# Altium PCB MultiPower.PcbDoc
Units mm, origin at the board's own origin, x right, y up, seen from the top; angles counter-clockwise.
Board outline 160 x 100 mm, 2 copper layers (Top Layer, Bottom Layer); 176 components, 131 nets, 634 pads, 0 vias.
Unrouted connection lines stored in the file: 412.
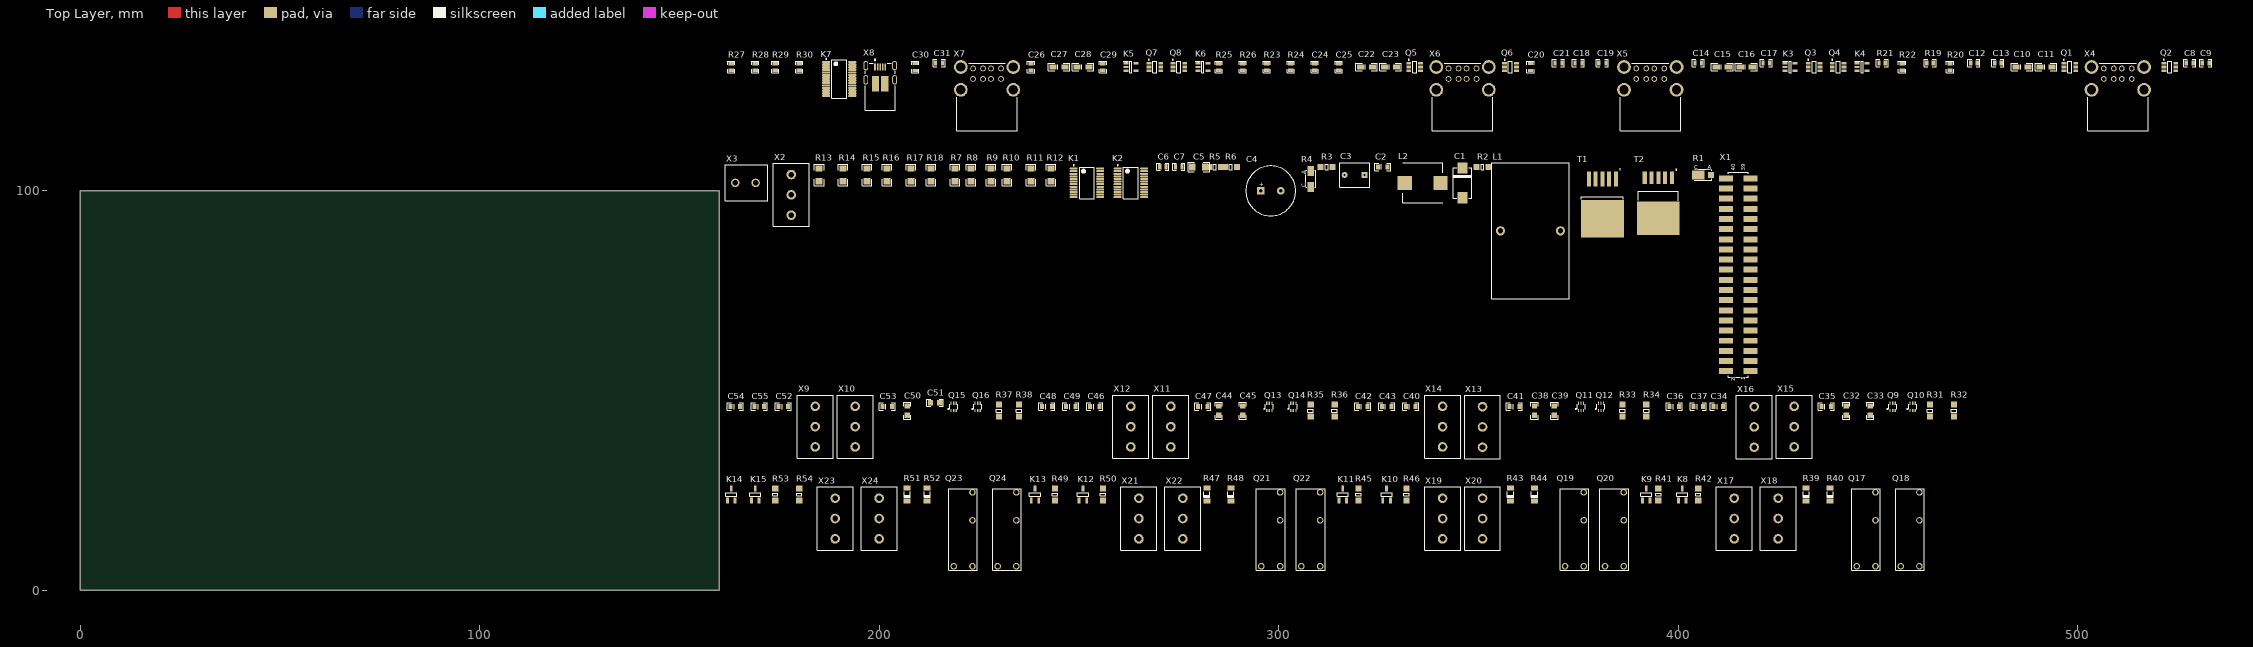
[diagram p0: Top Layer view]
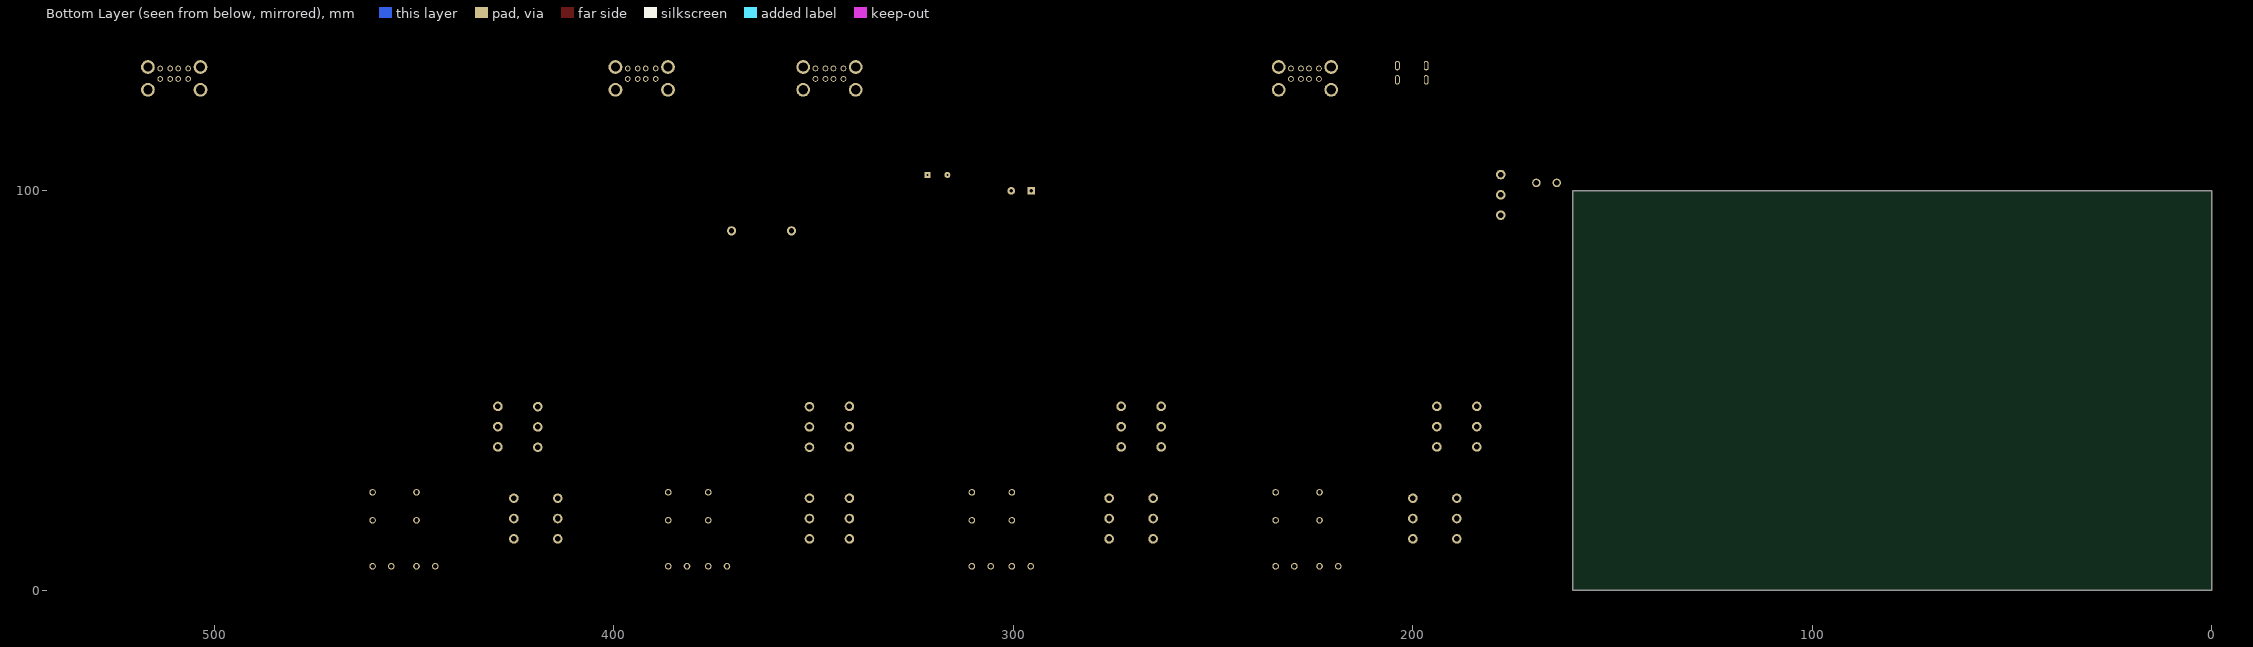
[diagram p1: Bottom Layer view, seen from below]

## Layer stack, top to bottom
Top Solder: solder mask 0.0102, Solder Resist, Dk 3.5
Top Layer: signal copper 0.0356
Dielectric 1: dielectric 0.32, FR-4, Dk 4.8
Bottom Layer: signal copper 0.0356
Bottom Solder: solder mask 0.0102, Solder Resist, Dk 3.5

## Board outline
0,0 160,0 160,100 0,100

## Design rules (kind name [scope] priority, off if disabled: settings)
Clearance [All] p1: gap=0.254 ignorepadtopadclearanceinfootprint=FALSE except(0: Arc-Hole Track-Hole SMDPad-Hole THPad-Hole Via-Hole Fill-Hole Poly-Hole Region-Hole Text-Hole)
DiffPairsRouting [All] p1: maxlimit=0.254 minlimit=0.254 mostfreqgap=0.254 toplayer_minwidth=0.381 toplayer_maxwidth=0.381 toplayer_prefwidth=0.381 bottomlayer_minwidth=0.381 bottomlayer_maxwidth=0.381 bottomlayer_prefwidth=0.381 maxuncoupledlength=12.7
PolygonConnect [All] p1: connectstyle=Relief reliefconductorwidth=0.254 reliefentries=4 polygonreliefangle="90 Angle" airgapwidth=0.254
RoomDefinition "U_USB Power" [InComponentClass('U_USB Power')] p1: confinementstyle=ConfineIn formatcopy=TRUE lockcomponents=FALSE outline 161,111 534,111 534,136 161,136
RoomDefinition U_Speisung [InComponentClass('U_Speisung')] p2: confinementstyle=ConfineIn formatcopy=TRUE lockcomponents=FALSE outline 161,52 421,52 421,110 161,110
RoomDefinition "U_DC Power" [InComponentClass('U_DC Power')] p3: confinementstyle=ConfineIn formatcopy=TRUE lockcomponents=FALSE outline 161,31 473,31 473,51 161,51
RoomDefinition "U_AC Plug Power" [InComponentClass('U_AC Plug Power')] p4: confinementstyle=ConfineIn formatcopy=TRUE lockcomponents=FALSE outline 161,3 463,3 463,30 161,30
RoutingVias [All] p1: holewidth=0.711 width=1.27 viastyle="Through Hole" minholewidth=0.711 minwidth=1.27 maxholewidth=0.711 maxwidth=1.27
SolderMaskExpansion [All] p1: expansion=0.102 istentingtop=FALSE
Width [All] p1: maxlimit=0.254 minlimit=0.254 preferedwidth=0.254
29 further rules are at their usual default settings.

## Classes and differential pairs
net class POWER: +5V +9V +12V GND L N PE
component class "U_USB Power": C8 C9 C10 C11 C12 C13 C14 C15 C16 C17 C18 C19 C20 C21 C22 C23 C24 C25 C26 C27 C28 C29 C30 C31 K3 K4 K5 K6 K7 Q1 Q2 Q3 Q4 Q5 Q6 Q7 Q8 R19 R20 R21 R22 R23 R24 R25 R26 R27 R28 R29 R30 X4 X5 X6 X7 X8
component class U_Speisung: C1 C2 C3 C4 C5 C6 C7 K1 K2 L1 L2 R1 R2 R3 R4 R5 R6 R7 R8 R9 R10 R11 R12 R13 R14 R15 R16 R17 R18 T1 T2 X1 X2 X3
component class "U_DC Power": C32 C33 C34 C35 C36 C37 C38 C39 C40 C41 C42 C43 C44 C45 C46 C47 C48 C49 C50 C51 C52 C53 C54 C55 Q9 Q10 Q11 Q12 Q13 Q14 Q15 Q16 R31 R32 R33 R34 R35 R36 R37 R38 X9 X10 X11 X12 X13 X14 X15 X16
component class "U_AC Plug Power": K8 K9 K10 K11 K12 K13 K14 K15 Q17 Q18 Q19 Q20 Q21 Q22 Q23 Q24 R39 R40 R41 R42 R43 R44 R45 R46 R47 R48 R49 R50 R51 R52 R53 R54 X17 X18 X19 X20 X21 X22 X23 X24
differential pair D: +D_P -D_N

## Components (designator, comment, footprint, x,y, rotation, side; value= is the part's Value field where it differs from the comment)
C1 "Capacitor" T521X337M016ATE015 346,102 r90 top value=330uF
C2 "Capacitor" "CAP TAN A R" 326,106 r0 top value=10uF
C3 "Capacitor" R82EC4100Z370J 319,104 r0 top value=1uF
C4 "Capacitor" "CAP ELKO 12.5x25x5 S" 298,100 r0 top value=4.7mF
C5 "Capacitor" "CAP CER 1206 H" 280,106 r0 top value=100nF
C6 "Capacitor" "CAP CER 0805 R" 271,106 r0 top value=100nF
C7 "Capacitor" "CAP CER 0805 R" 275,106 r0 top value=100nF
C8 "Capacitor P" T58W9476M6R3C0300 528,132 r0 top value=47uF
C9 "Capacitor P" T58W9476M6R3C0300 532,132 r0 top value=47uF
C10 "Capacitor P" "CAP TAN A H" 486,131 r0 top value=100uF
C11 "Capacitor P" "CAP TAN A H" 492,131 r0 top value=100uF
C12 "Capacitor" "CAP CER 0805 R" 474,132 r0 top value=100nF
C13 "Capacitor" "CAP CER 0805 R" 480,132 r0 top value=100nF
C14 "Capacitor" "CAP CER 0805 R" 405,132 r0 top value=100nF
C15 "Capacitor P" "CAP TAN A H" 411,131 r0 top value=100uF
C16 "Capacitor P" "CAP TAN A H" 417,131 r0 top value=100uF
C17 "Capacitor" "CAP CER 0805 R" 422,132 r0 top value=100nF
C18 "Capacitor P" T58W9476M6R3C0300 375,132 r0 top value=47uF
C19 "Capacitor P" T58W9476M6R3C0300 381,132 r0 top value=47uF
C20 "Capacitor P" T58W9476M6R3C0300 363,131 r90 top value=47uF
C21 "Capacitor P" T58W9476M6R3C0300 370,132 r0 top value=47uF
C22 "Capacitor P" "CAP TAN A H" 322,131 r0 top value=100uF
C23 "Capacitor P" "CAP TAN A H" 328,131 r0 top value=100uF
C24 "Capacitor" "CAP CER 0805 R" 309,131 r90 top value=100nF
C25 "Capacitor" "CAP CER 0805 R" 315,131 r90 top value=100nF
C26 "Capacitor" "CAP CER 0805 R" 238,131 r90 top value=100nF
C27 "Capacitor P" "CAP TAN A H" 245,131 r0 top value=100uF
C28 "Capacitor P" "CAP TAN A H" 251,131 r0 top value=100uF
C29 "Capacitor" "CAP CER 0805 R" 256,131 r90 top value=100nF
C30 "Capacitor P" T58W9476M6R3C0300 209,131 r90 top value=47uF
C31 "Capacitor P" T58W9476M6R3C0300 215,132 r0 top value=47uF
C32 "Capacitor" "CAP CER 0805 H" 442,45 r90 top value=1nF
C33 "Capacitor" "CAP CER 0805 H" 448,45 r90 top value=1nF
C34 "Capacitor P" "CAP TAN A R" 410,46 r0 top value=10uF
C35 "Capacitor P" "CAP TAN A R" 437,46 r0 top value=10uF
C36 "Capacitor P" "CAP TAN A R" 399,46 r0 top value=1uF
C37 "Capacitor P" "CAP TAN A R" 405,46 r0 top value=1uF
C38 "Capacitor" "CAP CER 0805 H" 364,45 r90 top value=1nF
C39 "Capacitor" "CAP CER 0805 H" 369,45 r90 top value=1nF
C40 "Capacitor P" "CAP TAN A R" 333,46 r0 top value=10uF
C41 "Capacitor P" "CAP TAN A R" 359,46 r0 top value=10uF
C42 "Capacitor P" "CAP TAN A R" 321,46 r0 top value=1uF
C43 "Capacitor P" "CAP TAN A R" 327,46 r0 top value=1uF
C44 "Capacitor" "CAP CER 0805 H" 285,45 r90 top value=1nF
C45 "Capacitor" "CAP CER 0805 H" 291,45 r90 top value=1nF
C46 "Capacitor P" "CAP TAN A R" 254,46 r0 top value=10uF
C47 "Capacitor P" "CAP TAN A R" 281,46 r0 top value=10uF
C48 "Capacitor P" "CAP TAN A R" 242,46 r0 top value=1uF
C49 "Capacitor P" "CAP TAN A R" 248,46 r0 top value=1uF
C50 "Capacitor" "CAP CER 0805 H" 207,45 r90 top value=1nF
C51 "Capacitor" "CAP CER 0805 H" 214,47 r0 top value=1nF
C52 "Capacitor P" "CAP TAN A R" 176,46 r0 top value=10uF
C53 "Capacitor P" "CAP TAN A R" 202,46 r0 top value=10uF
C54 "Capacitor P" "CAP TAN A R" 164,46 r0 top value=1uF
C55 "Capacitor P" "CAP TAN A R" 170,46 r0 top value=1uF
K1 "PCA8575PW" TSOP65P640X110-24M 252,102 r0 top
K2 "PCA8575PW" TSOP65P640X110-24M 263,102 r0 top
K3 "MC74VHC1G135DBVT1G" SOT95P275X110-5N 428,131 r0 top
K4 "MC74VHC1G135DBVT1G" SOT95P275X110-5N 446,131 r0 top
K5 "MC74VHC1G135DBVT1G" SOT95P275X110-5N 263,131 r0 top
K6 "MC74VHC1G135DBVT1G" SOT95P275X110-5N 281,131 r0 top
K7 "DG1207EUI+" TSOP65P640X100-28N 190,128 r0 top
K8 "BC817-16-7-F" SOT23-3 401,24 r0 top
K9 "BC817-16-7-F" SOT23-3 392,24 r0 top
K10 "BC817-16-7-F" SOT23-3 327,24 r0 top
K11 "BC817-16-7-F" SOT23-3 316,24 r0 top
K12 "BC817-16-7-F" SOT23-3 251,24 r0 top
K13 "BC817-16-7-F" SOT23-3 239,24 r0 top
K14 "BC817-16-7-F" SOT23-3 163,24 r0 top
K15 "BC817-16-7-F" SOT23-3 169,24 r0 top
L1 "Inductor" SHBC14-1R2A0187V 363,90 r0 top value=190uH
L2 "Inductor" SRP1038C6R8M 336,102 r0 top value=47uH
Q1 "MIC2033" SOT-23-6L 498,131 r0 top
Q2 "MIC2033" SOT-23-6L 523,131 r0 top
Q3 "MIC2033" SOT-23-6L 434,131 r0 top
Q4 "MIC2033" SOT-23-6L 440,131 r0 top
Q5 "MIC2033" SOT-23-6L 334,131 r0 top
Q6 "MIC2033" SOT-23-6L 358,131 r0 top
Q7 "MIC2033" SOT-23-6L 269,131 r0 top
Q8 "MIC2033" SOT-23-6L 275,131 r0 top
Q9 "SI1865DDL-T1-BE3" SOT-363 453,45 r0 top
Q10 "SI1865DDL-T1-BE3" SOT-363 458,45 r0 top
Q11 "SI1865DDL-T1-BE3" SOT-363 375,45 r0 top
Q12 "SI1865DDL-T1-BE3" SOT-363 380,45 r0 top
Q13 "SI1865DDL-T1-BE3" SOT-363 297,45 r0 top
Q14 "SI1865DDL-T1-BE3" SOT-363 303,45 r0 top
Q15 "SI1865DDL-T1-BE3" SOT-363 218,45 r0 top
Q16 "SI1865DDL-T1-BE3" SOT-363 224,45 r0 top
Q17 "G5NB1A4EDC5" G5NB1A4DC5 447,5 r90 top
Q18 "G5NB1A4EDC5" G5NB1A4DC5 458,5 r90 top
Q19 "G5NB1A4EDC5" G5NB1A4DC5 374,5 r90 top
Q20 "G5NB1A4EDC5" G5NB1A4DC5 384,5 r90 top
Q21 "G5NB1A4EDC5" G5NB1A4DC5 298,5 r90 top
Q22 "G5NB1A4EDC5" G5NB1A4DC5 308,5 r90 top
Q23 "G5NB1A4EDC5" G5NB1A4DC5 221,5 r90 top
Q24 "G5NB1A4EDC5" G5NB1A4DC5 232,5 r90 top
R1 "V8PAM10S-M3/H" DO-221BC 405,104 r0 top
R2 "Resistor" RESMELF3514N 351,106 r0 top value=7.5k
R3 "Resistor" RESMELF3514N 312,106 r0 top value=1.2k
R4 "B340A-M3/5AT" DO-214AC 308,103 r90 top
R5 "Resistor" RESMELF3514N 284,106 r0 top value=68k
R6 "Resistor" RESMELF3514N 288,106 r0 top value=6.8k
R7 "Resistor" "RES 1206 H" 219,104 r90 top value=0
R8 "Resistor" "RES 1206 H" 223,104 r90 top value=0
R9 "Resistor" "RES 1206 H" 228,104 r90 top value=0
R10 "Resistor" "RES 1206 H" 232,104 r90 top value=0
R11 "Resistor" "RES 1206 H" 238,104 r90 top value=0
R12 "Resistor" "RES 1206 H" 243,104 r90 top value=0
R13 "Resistor" "RES 1206 H" 185,104 r90 top value=0
R14 "Resistor" "RES 1206 H" 191,104 r90 top value=0
R15 "Resistor" "RES 1206 H" 197,104 r90 top value=0
R16 "Resistor" "RES 1206 H" 202,104 r90 top value=0
R17 "Resistor" "RES 1206 H" 208,104 r90 top value=0
R18 "Resistor" "RES 1206 H" 213,104 r90 top value=0
R19 "Resistor" "RES 0805 R" 463,132 r0 top value=10k
R20 "Resistor" "RES 0805 R" 468,131 r90 top value=10k
R21 "Resistor" "RES 0805 R" 451,132 r0 top value=10k
R22 "Resistor" "RES 0805 R" 456,131 r90 top value=10k
R23 "Resistor" "RES 0805 R" 297,131 r90 top value=10k
R24 "Resistor" "RES 0805 R" 303,131 r90 top value=10k
R25 "Resistor" "RES 0805 R" 285,131 r90 top value=10k
R26 "Resistor" "RES 0805 R" 291,131 r90 top value=10k
R27 "Resistor" "RES 0805 R" 163,131 r90 top value=10k
R28 "Resistor" "RES 0805 R" 169,131 r90 top value=10k
R29 "Resistor" "RES 0805 R" 174,131 r90 top value=10k
R30 "Resistor" "RES 0805 R" 180,131 r90 top value=10k
R31 "Resistor" RESMELF3514N 463,45 r90 top value=10k
R32 "Resistor" RESMELF3514N 469,45 r90 top value=10k
R33 "Resistor" RESMELF3514N 386,45 r90 top value=10k
R34 "Resistor" RESMELF3514N 392,45 r90 top value=10k
R35 "Resistor" RESMELF3514N 308,45 r90 top value=10k
R36 "Resistor" RESMELF3514N 314,45 r90 top value=10k
R37 "Resistor" RESMELF3514N 230,45 r90 top value=10k
R38 "Resistor" RESMELF3514N 235,45 r90 top value=10k
R39 "Diode" DIOMELF3515N 432,24 r90 top
R40 "Diode" DIOMELF3515N 438,24 r90 top
R41 "Resistor" RESMELF3514N 395,24 r90 top value=1k
R42 "Resistor" RESMELF3514N 405,24 r90 top value=1k
R43 "Diode" DIOMELF3515N 358,24 r90 top
R44 "Diode" DIOMELF3515N 364,24 r90 top
R45 "Resistor" RESMELF3514N 320,24 r90 top value=1k
R46 "Resistor" RESMELF3514N 332,24 r90 top value=1k
R47 "Diode" DIOMELF3515N 282,24 r90 top
R48 "Diode" DIOMELF3515N 288,24 r90 top
R49 "Resistor" RESMELF3514N 244,24 r90 top value=1k
R50 "Resistor" RESMELF3514N 256,24 r90 top value=1k
R51 "Diode" DIOMELF3515N 207,24 r90 top
R52 "Diode" DIOMELF3515N 212,24 r90 top
R53 "Resistor" RESMELF3514N 174,24 r90 top value=1k
R54 "Resistor" RESMELF3514N 180,24 r90 top value=1k
T1 "AP1501-K5G-13" TO-263-5L 381,93 r90 top
T2 "MC33167D2TR4G" TO-263-5 395,93 r90 top
X1 "40 pole header" "Header SMD Male 2x20 H" 415,79 r90 top
X2 "Netzteil 230V" 282841-3 178,99 r90 top
X3 "Netzteil 12V" 282841-2 164,102 r0 top
X4 "UJ2-ADH-1-TH" UJ2-ADH-1-TH 510,115 r0 top
X5 "UJ2-ADH-1-TH" UJ2-ADH-1-TH 393,115 r0 top
X6 "UJ2-ADH-1-TH" UJ2-ADH-1-TH 346,115 r0 top
X7 "UJ2-ADH-1-TH" UJ2-ADH-1-TH 227,115 r0 top
X8 "Micro USB" UJ2-MIBH-4-SMT-TR 199,131 r90 top
X9 "DC Power Jack" 282841-3 184,41 r90 top
X10 "DC Power Jack" 282841-3 194,41 r90 top
X11 "DC Power Jack" 282841-3 273,41 r90 top
X12 "DC Power Jack" 282841-3 263,41 r90 top
X13 "DC Power Jack" 282841-3 351,40.92 r90 top
X14 "DC Power Jack" 282841-3 341,41 r90 top
X15 "DC Power Jack" 282841-3 429,41 r90 top
X16 "DC Power Jack" 282841-3 419,40.92 r90 top
X17 "Plug AC Female" 282841-3 414,18 r90 top
X18 "Plug AC Female" 282841-3 425,18 r90 top
X19 "Plug AC Female" 282841-3 341,18 r90 top
X20 "Plug AC Female" 282841-3 351,18 r90 top
X21 "Plug AC Female" 282841-3 265,18 r90 top
X22 "Plug AC Female" 282841-3 276,18 r90 top
X23 "Plug AC Female" 282841-3 189,18 r90 top
X24 "Plug AC Female" 282841-3 200,18 r90 top

## Footprints (in the part's own frame and the unit in brackets; to place one, negate y for a bottom-side part, rotate by r counter-clockwise, add the part's x,y. Pads: shape width x height; smd on the part's side, far side on the other; paste and mask are expansions set on the pad)
282841-2 [mm]
  round 2.1 hole 1.4: 1(0,0) 2(5.08,0)
  silkscreen extent -2.54,-4.5 8.12,4.5, body extent -2.54,-4.5 8.12,4.5, height 15.11
282841-3 [mm]
  round 2.4 hole 1.4: 1(-5.08,0) 2(0,0) 3(5.08,0)
  silkscreen extent -7.9,-4.5 7.9,4.5, body extent -7.87,-4.5 7.87,4.5, height 15.2
"CAP CER 0805 H" [mm] "0805 ceramic capacitor for hand soldering"
  rect 1.3x1.35 smd: 1(-1.15,0) 2(1.15,0)
  silkscreen extent -2.1,-0.9 2.1,0.9, body extent -1,-0.62 1,0.63, height 0.8
"CAP CER 0805 R" [mm] "0805 ceramic capacitor for reflow soldering"
  rect 0.8x1.35 smd: 1(-0.8,0) 2(0.8,0)
  silkscreen extent -1.5,-0.9 1.5,0.9, body extent -1,-0.62 1,0.63, height 0.8
"CAP CER 1206 H" [mm] "1206 ceramic capacitor for hand soldering"
  rect 1.6x1.75 smd: 1(-1.6,0) 2(1.6,0)
  silkscreen extent -2.7,-1.2 2.7,1.2, body extent -1.6,-0.8 1.6,0.8, height 1.15
"CAP ELKO 12.5x25x5 S" [mm] "aluminium electrolytic capacitor standing upright on the pcb / d=12.5, h=25, pitch = 5"
  rect 1.9x1.9 hole 0.9: A(-2.5,0)
  round 1.9 hole 0.9: C(2.5,0)
  silkscreen extent -6.25,-6.25 6.25,6.25, body extent -6.25,-6.25 6.26,6.25, height 25.02
"CAP TAN A H" [mm] "tantalum chip coapcitor casetype A for hand soldering"
  rect 1.8x1.3 smd: A(-1.5,0) C(1.5,0)
  silkscreen extent -2.7,-0.95 2.7,0.95, body extent -1.6,-0.8 1.6,0.8, height 1.6
"CAP TAN A R" [mm] "tantalum chip coapcitor casetype A for reflow soldering"
  rect 1x1.3 smd: A(-1.2,0) C(1.2,0)
  silkscreen extent -2,-0.95 2,0.95, body extent -1.6,-0.8 1.6,0.8, height 1.6
DIOMELF3515N [mm] "MELF Diode, 2-Leads, Body 3.50x1.50mm, IPC Medium Density"
  rect 1.2x1.75 smd: A(1.65,0) C(-1.65,0)
  silkscreen extent -0.65,-0.78 0.65,0.77, body extent -1.85,-0.8 1.85,0.8, height 1.59
DO-214AC [mm]
  rect 2.5x1.7 smd: A(2,0) C(-2,0)
  silkscreen extent -2.1,-1.3 2.1,1.3, body extent -2.6,-1.3 2.6,1.3, height 2.4
DO-221BC [mm]
  rect 1.52x1.5 smd: A(3.22,0)
  rect 3.1x2.2 smd: C(0,0)
  silkscreen extent -0.97,-1.35 3.37,1.35, body extent -1.37,-1.3 3.82,1.3, height 0.95
G5NB1A4DC5 [mm]
  round 1.65 hole 1.1: 1(1.05,-2.35) 2(12.55,-2.35) 3(19.55,-2.35) 4(1.05,2.35)
  silkscreen extent 0,-3.6 20.5,3.6, body extent 0,-3.6 20.5,3.6, height 15.1
"Header SMD Male 2x20 H" [mm] "male header for smd mounting / pitch = 2.54mm / hand soldering"
  rect 1.5x3.5 smd: 1(-24.13,-3.048) 2(-24.13,3.048) 3(-21.59,-3.048) 4(-21.59,3.048) 5(-19.05,-3.048) 6(-19.05,3.048) 7(-16.51,-3.048) 8(-16.51,3.048) 9(-13.97,-3.048) 10(-13.97,3.048) 11(-11.43,-3.048) 12(-11.43,3.048) 13(-8.89,-3.048) 14(-8.89,3.048) 15(-6.35,-3.048) 16(-6.35,3.048) 17(-3.81,-3.048) 18(-3.81,3.048) 19(-1.27,-3.048) 20(-1.27,3.048) 21(1.27,-3.048) 22(1.27,3.048) 23(3.81,-3.048) 24(3.81,3.048) 25(6.35,-3.048) 26(6.35,3.048) 27(8.89,-3.048) 28(8.89,3.048) 29(11.43,-3.048) 30(11.43,3.048) 31(13.97,-3.048) 32(13.97,3.048) 33(16.51,-3.048) 34(16.51,3.048) 35(19.05,-3.048) 36(19.05,3.048) 37(21.59,-3.048) 38(21.59,3.048) 39(24.13,-3.048) 40(24.13,3.048)
  silkscreen extent -25.65,-2.54 25.65,2.54, body extent -25.4,-3.69 25.4,3.69, height 8.78
R82EC4100Z370J [mm]
  round 1.5 hole 0.5: A(-2.5,0)
  rect 1.5x1.5 hole 0.5: C(2.5,0)
  silkscreen extent -3.75,-3.05 3.75,3.05, body extent -3.75,-3.05 3.75,3.05, height 11.3
"RES 0805 R" [mm] "0805 resistor for reflow soldering"
  rect 0.8x1.35 smd: 1(-0.8,0) 2(0.8,0)
  silkscreen extent -1.5,-0.9 1.5,0.9, body extent -1.15,-0.67 1.15,0.68, height 0.76
"RES 1206 H" [mm] "1206 resistor for hand soldering"
  rect 1.6x1.75 smd: 1(-1.6,0) 2(1.6,0)
  silkscreen extent -2.7,-1.2 2.7,1.2, body extent -1.68,-0.86 1.68,0.87, height 0.85
RESMELF3514N [mm] "MELF Resistor, 2-Leads, Body 3.50x1.35mm, IPC Medium Density"
  rect 1.5x1.55 smd: 1(-1.5,0) 2(1.5,0)
  silkscreen extent -0.35,-0.67 0.35,0.67, body extent -1.75,-0.67 1.75,0.67, height 1.35
SHBC14-1R2A0187V [mm]
  round 2.3 hole 1.3: 1(-7.501,0) 2(7.501,0)
  silkscreen extent -9.7,-17 9.7,17, body extent -9.7,-17 9.7,17, height 38
SOT23-3 [mm] "SOT23-3"
  rect 0.7x1.5 smd: 1(-0.95,-1.5) 2(0.95,-1.5) 3(0,1.5)
  silkscreen extent -1.4,-0.45 1.4,0.45, body extent -1.45,-1.4 1.45,1.4, height 1.3
SOT95P275X110-5N [mm]
  rect 1.25x0.6 smd: 1(-1.25,0.95) 2(-1.25,0) 3(-1.25,-0.95) 4(1.25,-0.95) 5(1.25,0.95)
  silkscreen extent -1.88,-1.5 0.28,1.5, body extent -1.38,-1.5 1.38,1.5, height 1.1
SOT-23-6L [mm] "SOT23, 6-Leads, Body 2.90x2.80mm, Pitch 0.95mm, IPC Low Density"
  rect 1.2x0.65 smd: 1(-1.475,0.95) 2(-1.475,0) 3(-1.475,-0.95) 4(1.475,-0.95) 5(1.475,0) 6(1.475,0.95)
  silkscreen extent -1.6,-1.5 0.5,1.95, body extent -1.5,-1.5 1.5,1.5, height 1.45
SOT-363 [mm]
  rect 0.3x0.8 smd: 1(0,0) 2(0.65,0) 3(1.3,0) 4(1.3,1.84) 5(0.65,1.84) 6(0,1.84)
  silkscreen extent -0.8,0.29 1.65,1.54, body extent -0.4,-0.22 1.7,2.08, height 1
SRP1038C6R8M [mm]
  rect 3.55x3.5 smd: 1(-4.475,0) 2(4.475,0)
  silkscreen extent -5,-5 5,5, body extent -5.5,-5 5.5,5, height 3.81
T58W9476M6R3C0300 [mm] "0805 ceramic capacitor for reflow soldering"
  rect 0.8x1.35 smd: A(-0.889,0) C(0.889,0)
  silkscreen extent -1.5,-0.9 1.5,0.9, body extent -1.1,-0.74 1.1,0.71, height 0.86
T521X337M016ATE015 [mm]
  rect 2.8x2.6 smd: A(3.7,0) C(-3.7,0)
  silkscreen extent -3.8,-2.3 3.8,2.3, body extent -3.8,-2.3 3.8,2.3, height 4.31
TO-263-5 [mm]
  rect 3.05x1.016 smd: 1(10.3,-3.404) 2(10.3,-1.702) 3(10.3,0) 4(10.3,1.702) 5(10.3,3.404)
  rect 8.38x10.66 smd: 6(0.2,0)
  silkscreen extent 4.5,-5.01 12.4,5.01, body extent -3.99,-5.08 10.24,5.08, height 4.87
TO-263-5L [mm]
  rect 3.8x1 smd: 1(10,-3.4) 2(10,-1.7) 3(10,0) 4(10,1.7) 5(10,3.4)
  rect 9.45x10.75 smd: 6(0,0)
  silkscreen extent 4.92,-5.28 12.5,5.28, body extent -4.71,-5 10.96,5, height 4.78
TSOP65P640X100-28N [mm] "TSOP, 28-Leads, Body 9.70x4.40mm, Pitch 0.65mm, IPC Medium Density"
  oval 2.05x0.6 smd: 1(-3.275,4.225) 2(-3.275,3.575) 3(-3.275,2.925) 4(-3.275,2.275) 5(-3.275,1.625) 6(-3.275,0.975) 7(-3.275,0.325) 8(-3.275,-0.325) 9(-3.275,-0.975) 10(-3.275,-1.625) 11(-3.275,-2.275) 12(-3.275,-2.925) 13(-3.275,-3.575) 14(-3.275,-4.225) 15(3.275,-4.225) 16(3.275,-3.575) 17(3.275,-2.925) 18(3.275,-2.275) 19(3.275,-1.625) 20(3.275,-0.975) 21(3.275,-0.325) 22(3.275,0.325) 23(3.275,0.975) 24(3.275,1.625) 25(3.275,2.275) 26(3.275,2.925) 27(3.275,3.575) 28(3.275,4.225)
  silkscreen extent -3.4,-4.8 1.85,5.2, body extent -3.2,-4.8 3.2,4.8, height 1
TSOP65P640X110-24M [mm] "TSOP, 24-Leads, Body 7.80x4.40mm, Pitch 0.65mm, IPC Low Density"
  oval 2x0.5 smd: 1(-3.325,3.575) 2(-3.325,2.925) 3(-3.325,2.275) 4(-3.325,1.625) 5(-3.325,0.975) 6(-3.325,0.325) 7(-3.325,-0.325) 8(-3.325,-0.975) 9(-3.325,-1.625) 10(-3.325,-2.275) 11(-3.325,-2.925) 12(-3.325,-3.575) 13(3.325,-3.575) 14(3.325,-2.925) 15(3.325,-2.275) 16(3.325,-1.625) 17(3.325,-0.975) 18(3.325,-0.325) 19(3.325,0.325) 20(3.325,0.975) 21(3.325,1.625) 22(3.325,2.275) 23(3.325,2.925) 24(3.325,3.575)
  silkscreen extent -3.45,-3.95 1.85,4.55, body extent -3.2,-3.95 3.2,3.95, height 1.1
UJ2-ADH-1-TH [mm]
  round 1.42 hole 0.92: 1(-3.5,13.01) 2(-3.5,15.625) 3(-1,13.01) 4(-1,15.625) 5(1,13.01) 6(1,15.625) 7(3.5,13.01) 8(3.5,15.625)
  round 3.45 hole 2.3: 9(-6.57,15.98) 10(6.57,10.3) 11(-6.57,10.3) 12(6.57,15.98)
  silkscreen extent -7.55,0 7.55,16.95, body extent -8.02,0.03 8.02,17.13, height 16.17
UJ2-MIBH-4-SMT-TR [mm]
  rect 1.7x0.4 smd: 1(0,0.03) 2(0,-0.62) 3(0,-1.27) 4(0,-1.92) 5(0,-2.57)
  oval 2.4x1.2 hole 0.6 slot 1.7 at 0 deg: SH1(-3.2,2.33) SH2(0.35,2.33) SH5(-3.2,-4.87) SH6(0.35,-4.87)
  rect 3.9x1.8 smd: SH3(-4.2,-0.12) SH4(-4.2,-2.42)
  silkscreen extent -10.85,-5.02 2,2.48, body extent -10.82,-5.02 0.97,2.47, height 2.71

## Part data
C1 C2 C3 C4: library part "Capacitor P", "Polarized Capacitor", LatestRevisionDate=02.04.2019, Publisher="ICT Berufsbildungscenter AG"
C5 C6 C7 C12 C13 C14 C17 C24 C25 C26 C29 C32 C33 C38 C39 C44 C45 C50 C51: "Non polarized capacitor", LatestRevisionDate=01.04.2019, Publisher="ICT Berufsbildungscenter AG"
C8 C9 C10 C11 C15 C16 C18 C19 C20 C21 C22 C23 C27 C28 C30 C31 C34 C35 C36 C37 C40 C41 C42 C43 C46 C47 C48 C49 C52 C53 C54 C55: "Polarized Capacitor", LatestRevisionDate=02.04.2019, Publisher="ICT Berufsbildungscenter AG"
K7: "Analog Switch ICs", Manufacturer_Name="Maxim Integrated", Mouser Part Number=700-DG1207EUI+, ComponentLink1Description="New link", ComponentLink1URL=https://www.mouser.ch/ProductDetail/Maxim-Integrated/DG1207EUI%2b?qs=DPoM0jnrROX2%252BoIpSyCc8Q%3D%3D, Datasheet Link=https://datasheets.maximintegrated.com/en/ds/DG1206-DG1207.pdf, Height=1.1mm, Manufacturer_Part_Number=DG1207EUI+, Mouser Price/Stock=https://www.mouser.co.uk/ProductDetail/Maxim-Integrated/DG1207EUI%2b?qs=DPoM0jnrROX2%252BoIpSyCc8Q%3D%3D, Supplier 1=Mouser, Supplier Part Number 1=700-DG1207EUI+
K8 K9 K10 K11 K12 K13 K14 K15: "Transistor NPN in SOT23-3 package", Supplier Part Number 1=621-BC817-16-7-F, Supplier 1=Mouser
Q17 Q18 Q19 Q20 Q21 Q22 Q23 Q24: library part Relay-SPST, "Single-Pole Single-Throw Relay", LatestRevisionDate=17-Jul-2002, LatestRevisionNote="Re-released for DXP Platform.", PackageReference=MODULE4, Published=24-Mar-1999, Publisher="Altium Limited"
R1 R4: library part "Schottky Diode", "Schottky Diode", LatestRevisionDate=03.04.2019, Publisher="ICT Berufsbildungscenter AG"
T1: "Switching Voltage Regulators", Supplier Part Number 1=621-AP1501-K5G-13, ComponentLink1Description="New link", ComponentLink1URL=https://www.mouser.ch/ProductDetail/Diodes-Incorporated/AP1501-K5G-13?qs=%2Fha2pyFaduh7%252BHz23V2KcD1UGDob8qiicWPpp%2F%2FWUHCQ5NeehxH4og%3D%3D, Supplier 1=Mouser
T2: "Switching Voltage Regulators", Manufacturer_Name="ON Semiconductor", Mouser Part Number=863-MC33167D2TR4G, Arrow Part Number=MC33167D2TR4G, Arrow Price/Stock=https://www.arrow.com/en/products/mc33167d2tr4g/on-semiconductor, Datasheet Link=https://www.onsemi.com/pub/Collateral/MC34167-D.PDF, Manufacturer_Part_Number=MC33167D2TR4G, Mouser Price/Stock=https://www.mouser.co.uk/ProductDetail/ON-Semiconductor/MC33167D2TR4G?qs=scuLso4UvAPiI8Zw378tbw%3D%3D, Supplier 1=Mouser, Supplier Part Number 1=863-MC33167D2TR4G
X1: library part RaspberryHeader40, "board to board header", LatestRevisionDate=02.05.2019, Publisher="ICT Berufsbildungscenter AG"
X2: library part "Header 3", "board to board header", LatestRevisionDate=02.05.2019, Publisher="ICT Berufsbildungscenter AG"
X3: library part "Header 2", "board to board header", LatestRevisionDate=02.05.2019, Publisher="ICT Berufsbildungscenter AG"
X4 X5 X6 X7: "USB Type A", Manufacturer_Name="CUI Inc.", Mouser Part Number=490-UJ2-ADH-1-TH, Arrow Part Number=UJ2-ADH-1-TH, Arrow Price/Stock=https://www.arrow.com/en/products/uj2-adh-1-th/cui-devices, Datasheet Link=http://www.cui.com/product/resource/uj2-adh-th.pdf, Manufacturer_Part_Number=UJ2-ADH-1-TH, Mouser Price/Stock=https://www.mouser.co.uk/ProductDetail/CUI-Devices/UJ2-ADH-1-TH/?qs=5mqXD9RfOg1bQeR60A16hA%3D%3D
X8: "board to board header", LatestRevisionDate=02.05.2019, Publisher="ICT Berufsbildungscenter AG"
X9 X10 X11 X12 X13 X14 X15 X16: "DC Power Jack 9V"
X17 X18 X19 X20 X21 X22 X23 X24: library part "Plug AC Male", "IEC Mains Power Inlet, EN60 320-1 C14 Class I Cold Condition, PC Flange Rear Mount, Chassis Plug", MaximumRating="10A, 250V a.c. (UL & CSA 15A, 250V a.c.)", PackageDocument="ver.80, 15-Sep-2003", ComponentLink1Description="Manufacturer Link", ComponentLink1URL=http://www.bulgin.co.uk/, DatasheetDocument="ver.80, 15-Sep-2003", DrillSize="Corresponds to nominal value.", LatestRevisionDate=15-Jul-2004, LatestRevisionNote="Component Replaced.", MountingFixtures="Not drawn on schematic symbol.", Note="IEC Color Scheme employed for L, N and E.", PackageReference=PX0580/PC, PCB_Layout="Complies with manufacturer's recommendation.", Published=15-Jul-2004, Publisher="Altium Limited", Terminations="P.C. Spills"
L1 L2: LatestRevisionDate=05.04.2019, Publisher="ICT Berufsbildungscenter AG", Type=Typ
Q1 Q2 Q3 Q4 Q5 Q6 Q7 Q8: ComponentLink1Description="New link", ComponentLink1URL=https://www.mouser.ch/ProductDetail/Microchip-Technology-Micrel/MIC2033-10AYM6-TR?qs=Y3Q3JoKAO1RvbLJdilrfXQ%3D%3D
R2 R3 R5 R6 R7 R8 R9 R10 R11 R12 R13 R14 R15 R16 R17 R18 R19 R20 R21 R22 R23 R24 R25 R26 R27 R28 R29 R30 R31 R32 R33 R34 R35 R36 R37 R38 R41 R42 R45 R46 R49 R50 R53 R54: LatestRevisionDate=02.04.2019, Publisher="ICT Berufsbildungscenter AG"
R39 R40 R43 R44 R47 R48 R51 R52: LatestRevisionDate=03.04.2019, Publisher="ICT Berufsbildungscenter AG"

## Nets (pads, with @x,y where several pads share a name; then routed paths per layer and width w, separated by ;. In a path a pad name is that pad's centre, name@x,y a point inside that pad or via, vN(x,y) a via of type N, cw(c..) or ccw(c..) an arc to the next point about the centre after c; other vN are vias at no path point)
+5V: C4.A C6.2 C7.2 C8.A C9.A C12.1 C13.1 C14.1 C17.1 C18.A C19.A C20.A C21.A C24.1 C25.1 C26.1 C29.1 C30.A C31.A K1.24 K2.24 K3.5 K4.5 K5.5 K6.5 L1.2 Q1.1 Q2.1 Q3.1 Q4.1 Q5.1 Q6.1 Q7.1 Q8.1 Q17.4 Q18.4 Q19.4 Q20.4 Q21.4 Q22.4 Q23.4 Q24.4 R6.2 R7.2 R8.2 R9.2 R10.2 R11.2 R12.2 R19.1 R20.1 R21.1 R22.1 R23.1 R24.1 R25.1 R26.1 R39.C R40.C R43.C R44.C R47.C R48.C R51.C R52.C X1.2 X1.4 X8.1
+9V: C3.A C34.A C35.A C40.A C41.A C46.A C47.A C52.A C53.A L2.2 Q9.4 Q10.4 Q11.4 Q12.4 Q13.4 Q14.4 Q15.4 Q16.4 R2.2 R31.2 R32.2 R33.2 R34.1 R35.2 R36.1 R37.2 R38.1
+12V: C1.A C2.A K7.1 T1.1 T2.4 X3.1
D1_N: K7.11 X4.2
D1_P: K7.19 X4.3
D2_N: K7.10 X4.6
D2_P: K7.20 X4.7
D3_N: K7.9 X5.2
D3_P: K7.21 X5.3
D4_N: K7.8 X5.6
D4_P: K7.22 X5.7
D5_N: K7.7 X6.2
D5_P: K7.23 X6.3
D6_N: K7.6 X6.6
D6_P: K7.24 X6.7
D7_N: K7.5 X7.2
D7_P: K7.25 X7.3
D8_N: K7.4 X7.6
D8_P: K7.26 X7.7
D_N: K7.2 X8.2
D_P: K7.28 X8.3
"F\ 2": K3.1 K3.2 Q1.4 Q2.4 R21.2
"F\ 3": K4.1 K4.2 Q3.4 Q4.4 R22.2
"F\ 6": K5.1 K5.2 Q5.4 Q6.4 R25.2
"F\ 7": K6.1 K6.2 Q7.4 Q8.4 R26.2
GND: C1.C C2.C C3.C C4.C C6.1 C7.1 C8.C C9.C C10.C C11.C C15.C C16.C C18.C C19.C C20.C C21.C C22.C C23.C C27.C C28.C C30.C C31.C K1.12 K2.12 K3.3 K4.3 K5.3 K6.3 K7.12 K7.27 K8.2 K9.2 K10.2 K11.2 K12.2 K13.2 K14.2 K15.2 Q1.2 Q2.2 Q3.2 Q4.2 Q5.2 Q6.2 Q7.2 Q8.2 Q9.1 Q10.1 Q11.1 Q12.1 Q13.1 Q14.1 Q15.1 Q16.1 R1.A R3.1 R4.A R13.1 R14.1 R15.1 R16.1 R17.1 R18.1 R27.1 R28.1 R29.1 R30.1 T1.3 T1.5 T1.6 T2.3 T2.6 X1.6 X1.9 X1.14 X1.20 X1.25 X1.30 X1.34 X1.39 X3.2 X4.4 X4.8 X5.4 X5.8 X6.4 X6.8 X7.4 X7.8 X8.5 X9.2 X9.3 X10.2 X10.3 X11.2 X11.3 X12.2 X12.3 X13.2 X13.3 X14.2 X14.3 X15.2 X15.3 X16.2 X16.3
L: Q17.2 Q18.2 Q19.2 Q20.2 Q21.2 Q22.2 Q23.2 Q24.2 X2.2
N: X2.1 X17.2 X18.2 X19.2 X20.2 X21.2 X22.2 X23.2 X24.2
NetC5_1: C5.1 R5.1
NetC5_2: C5.2 T2.5
NetC10_A: C10.A Q1.6 X4.1
NetC11_A: C11.A Q2.6 X4.5
NetC12_2: C12.2 Q1.5
NetC13_2: C13.2 Q2.5
NetC14_2: C14.2 Q3.5
NetC15_A: C15.A Q3.6 X5.1
NetC16_A: C16.A Q4.6 X5.5
NetC17_2: C17.2 Q4.5
NetC22_A: C22.A Q5.6 X6.1
NetC23_A: C23.A Q6.6 X6.5
NetC24_2: C24.2 Q5.5
NetC25_2: C25.2 Q6.5
NetC26_2: C26.2 Q7.5
NetC27_A: C27.A Q7.6 X7.1
NetC28_A: C28.A Q8.6 X7.5
NetC29_2: C29.2 Q8.5
NetC32_1: C32.1 C36.A Q9.2 Q9.3 X9.1
NetC32_2: C32.2 Q9.6 R31.1
NetC33_1: C33.1 C37.A Q10.2 Q10.3 X10.1
NetC33_2: C33.2 Q10.6 R32.1
NetC38_1: C38.1 C42.A Q11.2 Q11.3 X11.1
NetC38_2: C38.2 Q11.6 R33.1
NetC39_1: C39.1 C43.A Q12.2 Q12.3 X12.1
NetC39_2: C39.2 Q12.6 R34.2
NetC44_1: C44.1 C48.A Q13.2 Q13.3 X13.1
NetC44_2: C44.2 Q13.6 R35.1
NetC45_1: C45.1 C49.A Q14.2 Q14.3 X14.1
NetC45_2: C45.2 Q14.6 R36.2
NetC50_1: C50.1 C54.A Q15.2 Q15.3 X15.1
NetC50_2: C50.2 Q15.6 R37.1
NetC51_1: C51.1 C55.A Q16.2 Q16.3 X16.1
NetC51_2: C51.2 Q16.6 R38.2
NetK1_2: K1.2 R8.1 R14.2
NetK1_3: K1.3 R9.1 R15.2
NetK1_4: K1.4 Q8.3
NetK1_5: K1.5 Q7.3
NetK1_6: K1.6 Q6.3
NetK1_7: K1.7 Q5.3
NetK1_8: K1.8 Q4.3
NetK1_9: K1.9 Q3.3
NetK1_10: K1.10 Q2.3
NetK1_11: K1.11 Q1.3
NetK1_13: K1.13 K6.4 R24.2
NetK1_14: K1.14 K5.4 R23.2
NetK1_15: K1.15 K4.4 R20.2
NetK1_16: K1.16 K3.4 R19.2
NetK1_17: K1.17 K7.15 R27.2
NetK1_18: K1.18 K7.16 R28.2
NetK1_19: K1.19 K7.17 R29.2
NetK1_20: K1.20 K7.18 R30.2
NetK1_21: K1.21 R7.1 R13.2
NetK2_2: K2.2 R11.1 R17.2
NetK2_3: K2.3 R12.1 R18.2
NetK2_4: K2.4 Q16.5
NetK2_5: K2.5 Q15.5
NetK2_6: K2.6 Q14.5
NetK2_7: K2.7 Q13.5
NetK2_8: K2.8 Q12.5
NetK2_9: K2.9 Q11.5
NetK2_10: K2.10 Q10.5
NetK2_11: K2.11 Q9.5
NetK2_13: K2.13 R54.2
NetK2_14: K2.14 R53.1
NetK2_15: K2.15 R50.2
NetK2_16: K2.16 R49.1
NetK2_17: K2.17 R46.2
NetK2_18: K2.18 R45.1
NetK2_19: K2.19 R42.2
NetK2_20: K2.20 R41.1
NetK2_21: K2.21 R10.1 R16.2
NetK8_1: K8.1 R42.1
NetK8_3: K8.3 Q18.3 R40.A
NetK9_1: K9.1 R41.2
NetK9_3: K9.3 Q17.3 R39.A
NetK10_1: K10.1 R46.1
NetK10_3: K10.3 Q20.3 R44.A
NetK11_1: K11.1 R45.2
NetK11_3: K11.3 Q19.3 R43.A
NetK12_1: K12.1 R50.1
NetK12_3: K12.3 Q22.3 R48.A
NetK13_1: K13.1 R49.2
NetK13_3: K13.3 Q21.3 R47.A
NetK14_1: K14.1 R53.2
NetK14_3: K14.3 Q23.3 R51.A
NetK15_1: K15.1 R54.1
NetK15_3: K15.3 Q24.3 R52.A
NetL1_1: L1.1 R1.C T2.2
NetL2_1: L2.1 R4.C T1.2
NetQ17_1: Q17.1 X17.1
NetQ18_1: Q18.1 X18.1
NetQ19_1: Q19.1 X19.1
NetQ20_1: Q20.1 X20.1
NetQ21_1: Q21.1 X21.1
NetQ22_1: Q22.1 X22.1
NetQ23_1: Q23.1 X23.1
NetQ24_1: Q24.1 X24.1
NetR2_1: R2.1 R3.2 T1.4
NetR5_2: R5.2 R6.1 T2.1
PE: X2.3 X17.3 X18.3 X19.3 X20.3 X21.3 X22.3 X23.3 X24.3
SCL: K1.22 K2.22 X1.5
SDA: K1.23 K2.23 X1.3
pads on no net: C34.C C35.C C36.C C37.C C40.C C41.C C42.C C43.C C46.C C47.C C48.C C49.C C52.C C53.C C54.C C55.C K1.1 K2.1 K7.3 K7.13 K7.14 X1.1 X1.7 X1.8 X1.10 X1.11 X1.12 X1.13 X1.15 X1.16 X1.17 X1.18 X1.19 X1.21 X1.22 X1.23 X1.24 X1.26 X1.27 X1.28 X1.29 X1.31 X1.32 X1.33 X1.35 X1.36 X1.37 X1.38 X1.40 X4.9 X4.10 X4.11 X4.12 X5.9 X5.10 X5.11 X5.12 X6.9 X6.10 X6.11 X6.12 X7.9 X7.10 X7.11 X7.12 X8.4 X8.SH1 X8.SH2 X8.SH3 X8.SH4 X8.SH5 X8.SH6

## Silkscreen, mask and mechanical layers (free items; w line width, h text height)
Mechanical 1:
  the board outline again, w0.1

## Dimensions
0,0 to 0,100 on Mechanical 1
0,0 to 160,0 on Mechanical 1

## Text inside footprints (layer, text, board x,y; h text height)
C4: Top Overlay "+" at 295.15,101.2 h1
R1: Top Overlay "C" at 404.025,105.35 h1; Top Overlay "A" at 407.409,105.35 h1
R4: Top Overlay "C" at 306.7,100.9 h1 r90; Top Overlay "A" at 306.7,104.134 h1 r90
X1: Top Overlay "39" at 416.77,105.035 h1 r90; Top Overlay "40" at 414.23,105.035 h1 r90; Top Overlay "2" at 414.23,52.33 h1 r90; Top Overlay "1" at 416.77,52.584 h1 r90
X8: Mechanical 13 "PCB EDGE" at 205.6,123.4 h0.7 r90